# Altium PCB PCB_V2I3.PcbDoc
Units mil, origin at the board's own origin, x right, y up, seen from the top; angles counter-clockwise.
Board outline 2440.92 x 2539.37 mil, 2 copper layers (Top Layer, Bottom Layer); 68 components, 58 nets, 284 pads, 63 vias.
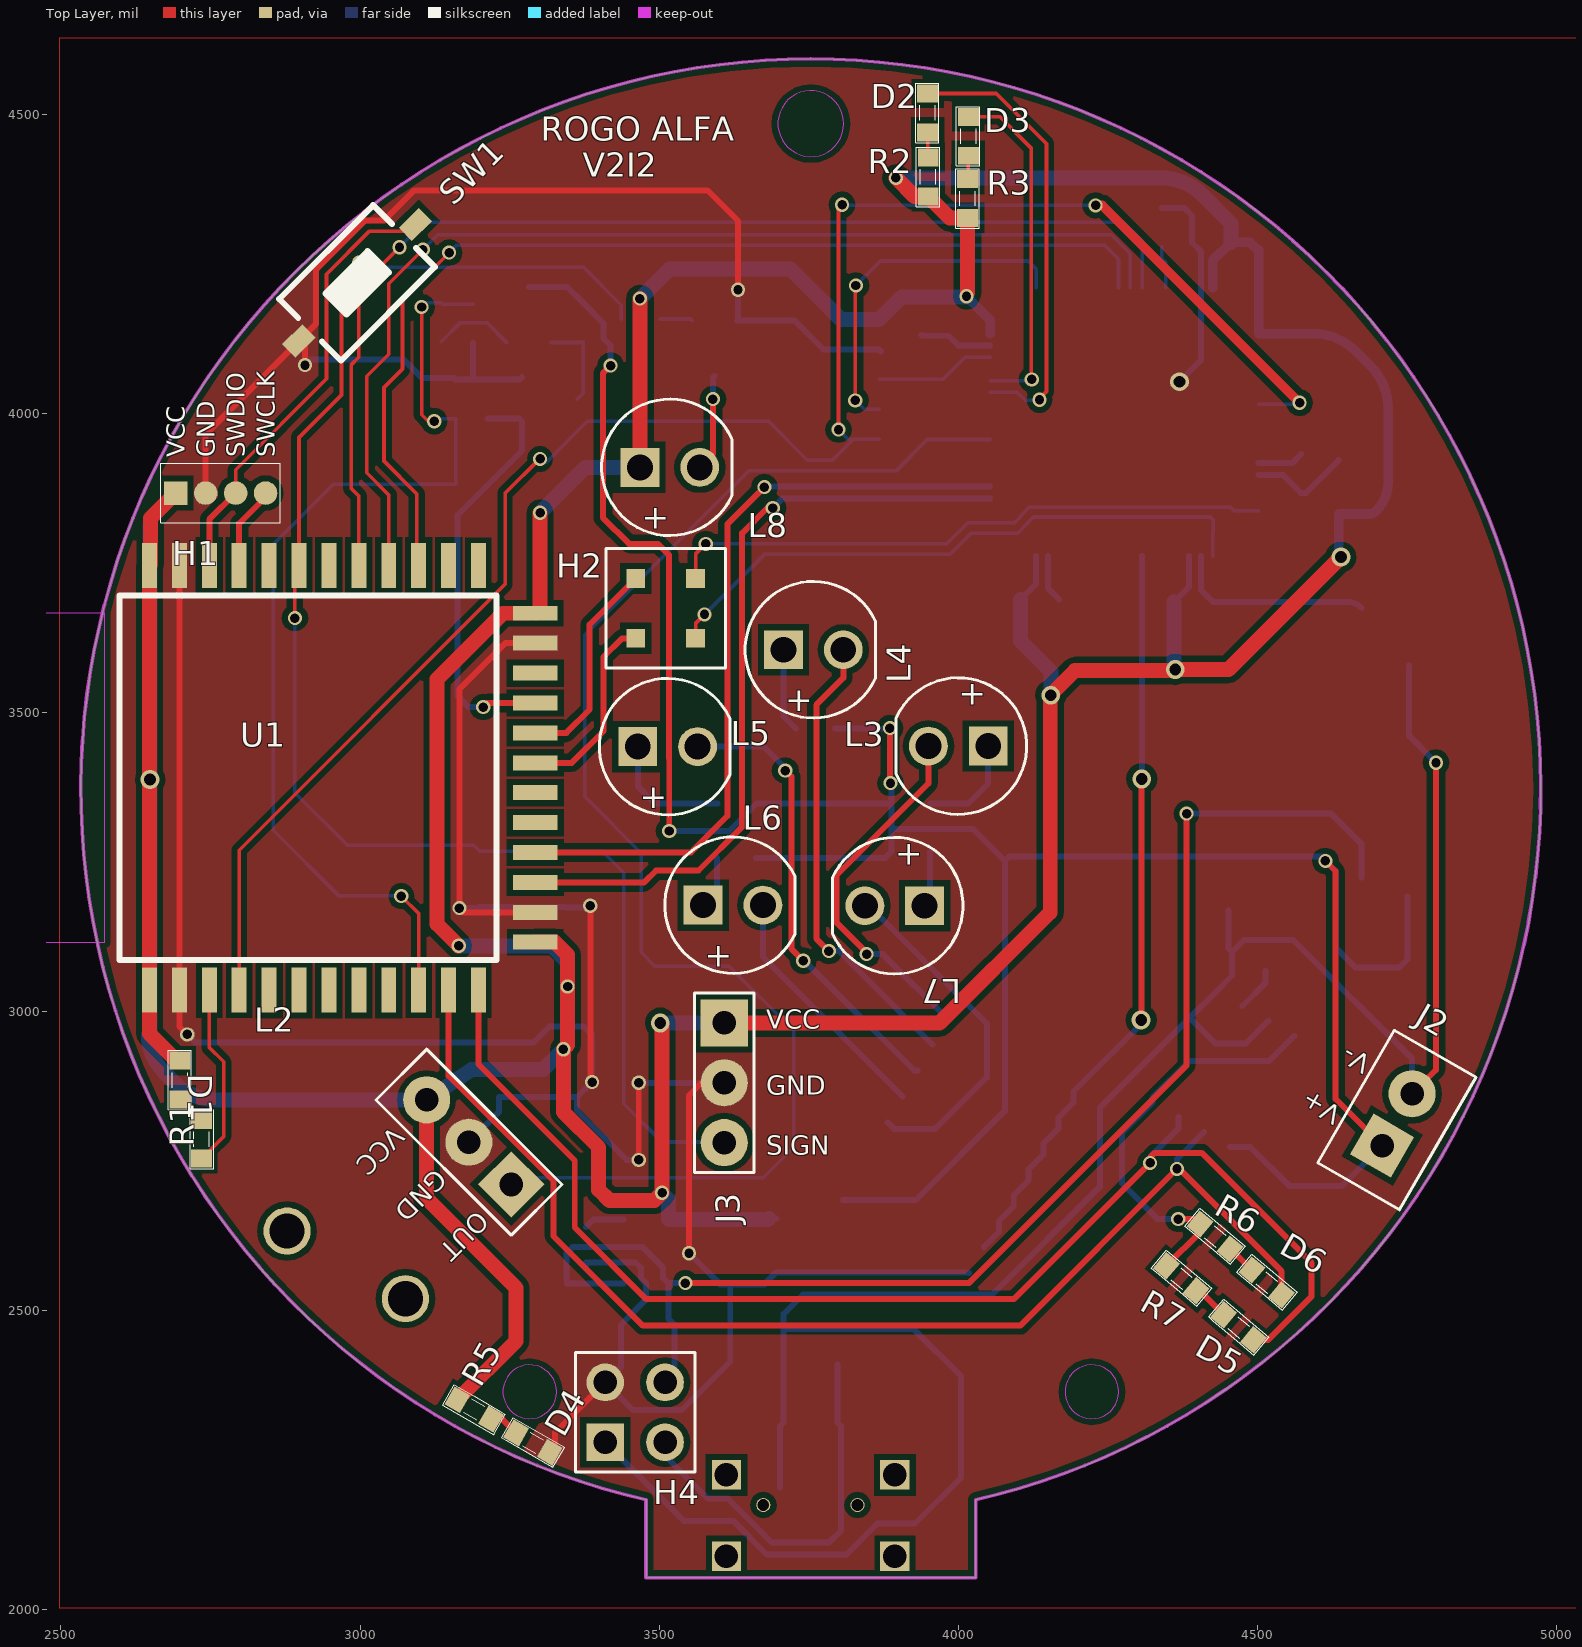
[diagram p0: Top Layer view]
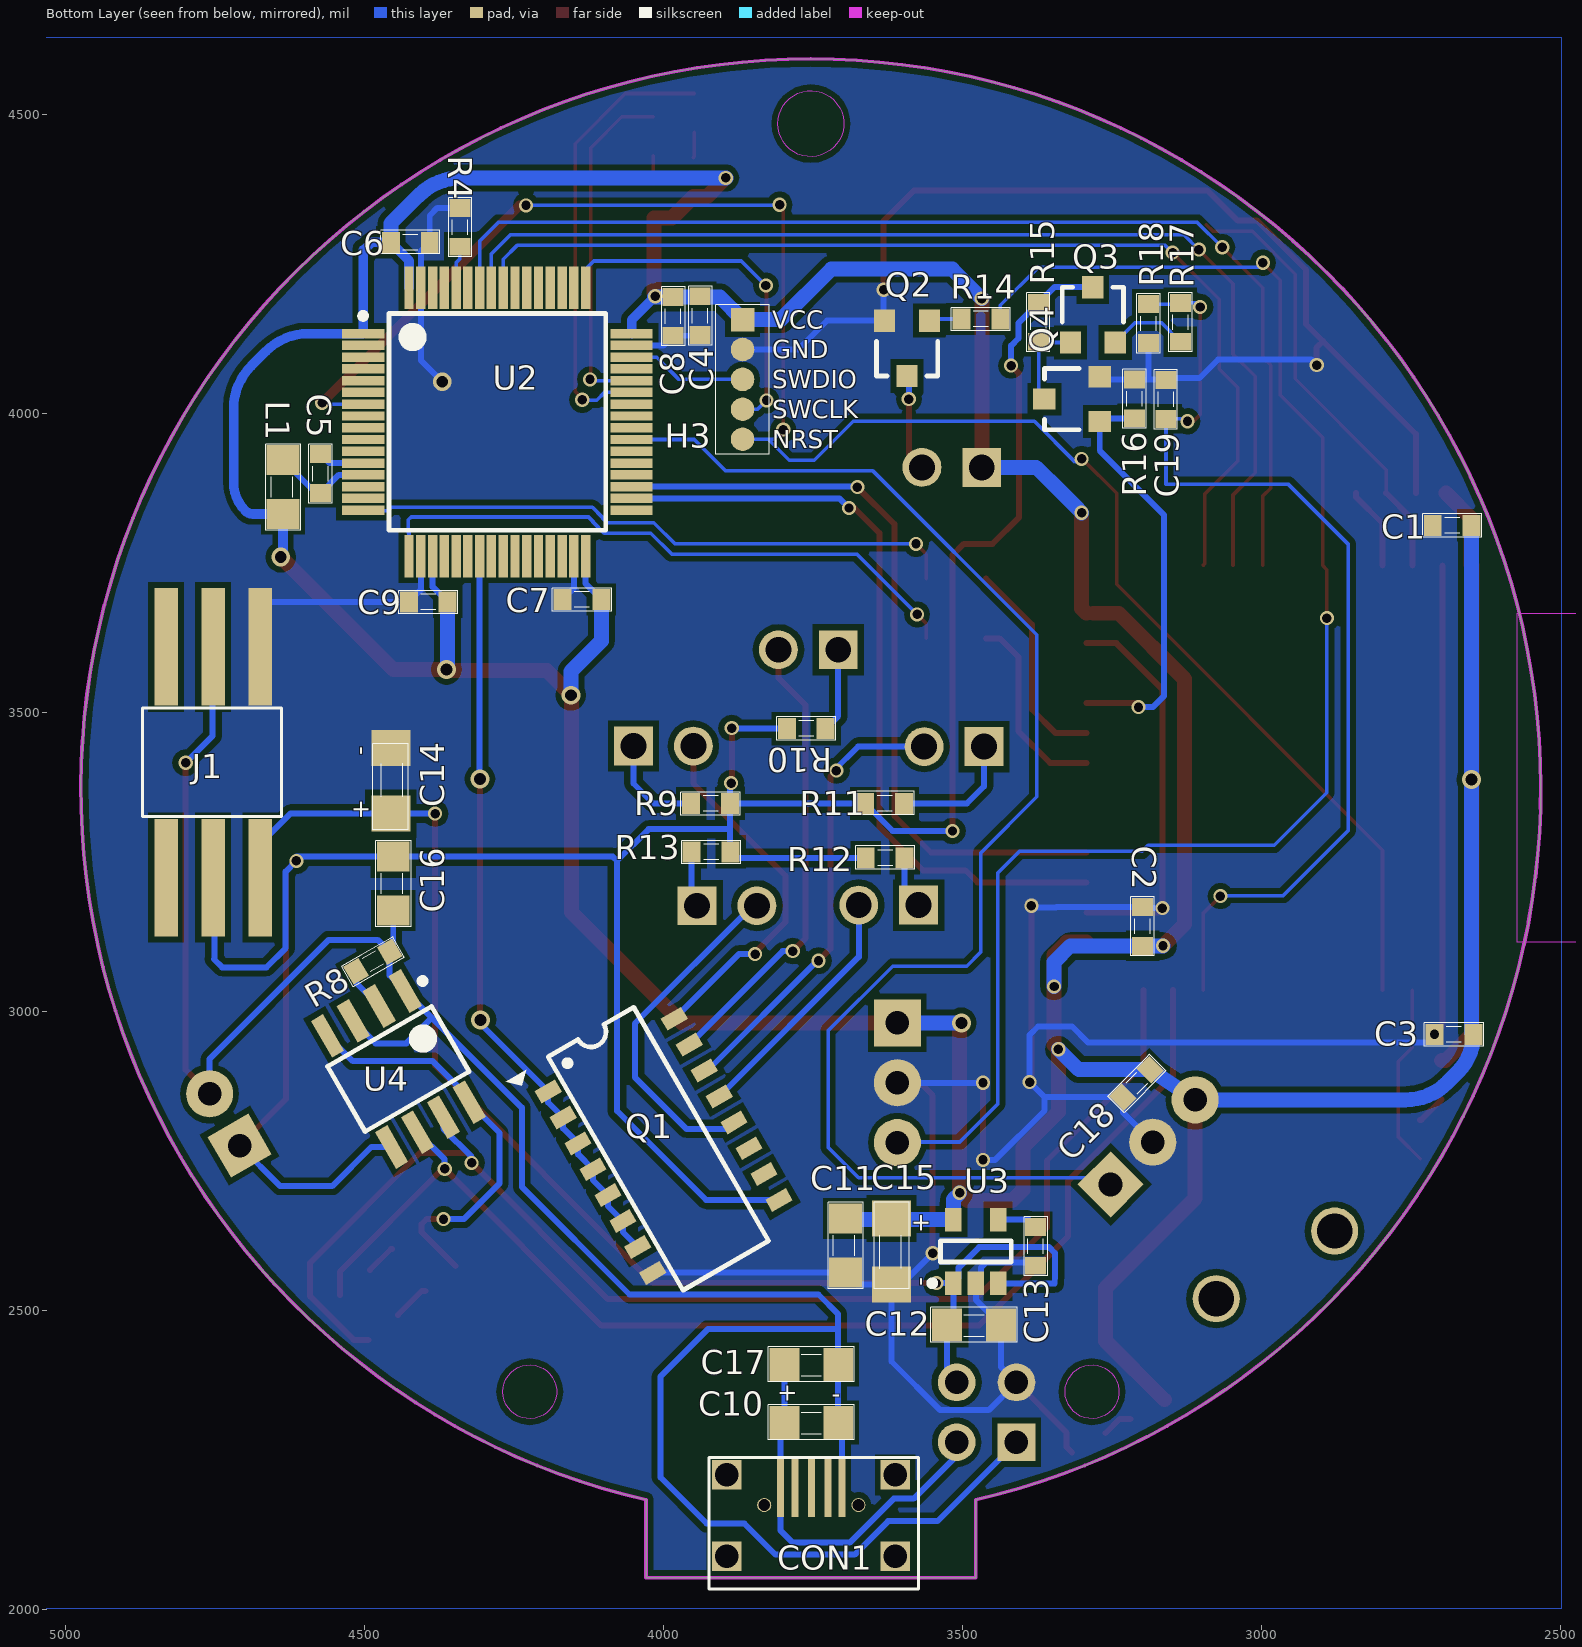
[diagram p1: Bottom Layer view, seen from below]

## Layer stack, top to bottom
Top Solder: solder mask 0.4, Solder Resist, Dk 3.5
Top Layer: signal copper 1.4
Dielectric 1: dielectric 12.6, FR-4, Dk 4.8
Bottom Layer: signal copper 1.4
Bottom Solder: solder mask 0.4, Solder Resist, Dk 3.5

## Board outline
3478.18,2053.49 3478.18,2183.44 cw(c3753.78,3372.39) 4029.37,2183.44 4029.37,2053.49

## Design rules (kind name [scope] priority, off if disabled: settings)
Clearance Clearance_1 [All vs InPolygon] p1: gap=10
Clearance [All] p2: gap=10
DiffPairsRouting [All] p1: maxlimit=10 minlimit=10 mostfreqgap=10 toplayer_minwidth=6 toplayer_maxwidth=20 toplayer_prefwidth=8 bottomlayer_minwidth=6 bottomlayer_maxwidth=20 bottomlayer_prefwidth=8 maxuncoupledlength=500
PolygonConnect [All] p1: connectstyle=Direct reliefconductorwidth=10 reliefentries=4 polygonreliefangle="90 Angle" airgapwidth=10
RoutingVias [All] p1: holewidth=15.75 width=23.62 viastyle="Through Hole" minholewidth=11.81 minwidth=23.62 maxholewidth=19.68 maxwidth=31.5
SolderMaskExpansion [All] p1: expansion=4
Width [All] p1: maxlimit=25 minlimit=6 preferedwidth=16
29 further rules are at their usual default settings.

## Classes and differential pairs
component class "[03] - MODULE BLE": C1 C2 C3 D1 H1 H2 R1 SW1 U1
component class "[04] - MCU STM32": C4 C5 C6 C7 C8 C9 D2 D3 H3 L1 R2 R3 R4 U2
component class "[05] - POWER": C10 C11 C12 C13 C14 C15 C16 C17 CON1 D4 D5 D6 H4 J1 J2 R5 R6 R7 R8 U3 U4
component class "[06] - PERIPHERAL": C18 C19 J3 L2 L3 L4 L5 L6 L7 L8 Q1 Q2 Q3 Q4 R9 R10 R11 R12 R13 R14 R15 R16 R17 R18

## Components (designator, comment, footprint, x,y, rotation, side; value= is the part's Value field where it differs from the comment)
C1 "C_104_0603_CERAMIC_16V" CAP_SMD0603 2694,3813 r0 bottom
C2 "C_104_0603_CERAMIC_16V" CAP_SMD0603 3199,3155 r90 bottom
C3 "C_104_0603_CERAMIC_16V" CAP_SMD0603 2691,2962 r0 bottom
C4 "C_104_0603_CERAMIC_16V" CAP_SMD0603 3939,4151 r270 bottom
C5 "C_104_0603_CERAMIC_16V" CAP_SMD0603 4573.35,3912 r90 bottom
C6 "C_104_0603_CERAMIC_16V" CAP_SMD0603 4411,4286 r180 bottom
C7 "C_104_0603_CERAMIC_16V" CAP_SMD0603 4149,3689 r0 bottom
C8 "C_104_0603_CERAMIC_16V" CAP_SMD0603 3984,4150 r270 bottom
C9 "C_104_0603_CERAMIC_16V" CAP_SMD0603 4406,3685 r0 bottom
C10 "C_106_0805_TANTALUM_16V" "CAP_SMD0805 - TANTALUM" 3753,2313 r180 bottom
C11 "C_106_0805_CERAMIC_16V" CAP_SMD0805 3696,2609 r270 bottom
C12 "C_106_0805_CERAMIC_16V" CAP_SMD0805 3481,2476 r180 bottom
C13 "C_104_0603_CERAMIC_16V" CAP_SMD0603 3378,2595 r270 bottom
C14 "C_106_1206_TANTALUM_25V" CAP_SMD1206_TANTALUM 4456,3376 r90 bottom
C15 "C_106_1206_TANTALUM_25V" CAP_SMD1206_TANTALUM 3619,2609 r270 bottom
C16 "C_106_0805_CERAMIC_16V" CAP_SMD0805 4452,3214 r270 bottom
C17 "C_106_0805_CERAMIC_16V" CAP_SMD0805 3753,2410 r180 bottom
C18 "C_22pF_SMD0603_CERAMIC_50V" CAP_SMD0603 3218,2871 r315 bottom
C19 "C_104_0603_CERAMIC_16V" CAP_SMD0603 3160,4036 r90 bottom
CON1 "MICRO_USB" CON_MICRO_USB_HOLE 3894.18,2089.43 r180 bottom
D1 "LED2_GREEN_0603_2V" LED_GREEN_SMD0603 2735,2774 r270 top
D2 "GREEN" LED_GREEN_SMD0603 3949,4515 r90 top
D3 "YELLOW" LED_YELLOW_SMD0603 4017,4476 r90 top
D4 "LED2_RED_0603_2V" LED_RED_SMD0603 3300,2273 r330 top
D5 "GREEN" LED_GREEN_SMD0603 4478.47,2464.07 r320 top
D6 "RED" LED_RED_SMD0603 4525.53,2538.93 r320 top
H1 "SWDIO_NRF518XX" HEADER4_ISP_NRF518xx_SUR1.27 2692,3867 r0 top
H2 "HEADER2_MALE2_SURFACE_2.54_6.1MM" HEADER2_MALE2_SUR2.54 3461,3724.18 r0 top
H3 "SWDIO_STM32xx" "HEADER5_ISP_STM32F0xx_SUR1.27 - duplicate" 3868,4157 r270 bottom
H4 "HEADER2_MALE2_HOLE2.54_5.8MM" HEADER2_MALE2_HOLE2.54 3410,2280 r90 top
J1 "PUSH_POWER" SW6_DPDT_POWER 4831.74,3326.36 r180 bottom
J2 "ZACK_BAT" ZACK_BAT 4709,2776 r60 top
J3 "SIGN_LED" HEADER3_SIGN_LED 3609,2981 r270 top
L1 "CHOKE_100NH_SMD0805" CHOKE_SMD0805 4636.36,3877 r270 bottom
L2 "LED3_RECEIVER_IR" LED3_IR_RECEIVER 3252.78,2710.92 r135 top
L3 "TSAL6400" LED2_IR_TRANSMITOR 4000.29,3444 r180 top
L4 "TSAL6400" LED2_IR_TRANSMITOR 3758,3605 r0 top
L5 "TSAL6400" LED2_IR_TRANSMITOR 3514.36,3443 r0 top
L6 "TSAL6400" LED2_IR_TRANSMITOR 3623.64,3178 r0 top
L7 "TSAL6400" LED2_IR_TRANSMITOR 3894,3177 r180 top
L8 "LED 3W" LED2_IR_TRANSMITOR 3518,3910 r0 top
Q1 "ULN2003A" TRAN7_ULN2003_16SOIC 4008.74,2770.61 r240 bottom
Q2 "NPN" TRAN-NPN-SMD 3593,4109 r0 bottom
Q3 "SI2307" TRAN-PNP-SMD 3282.37,4164.93 r180 bottom
Q4 "SI2308" TRAN-NPN-SMD 3317,4024 r90 bottom
R1 "R_10K_SMD0603_1%_1/10W" RES_SMD0603 2699,2898 r90 top
R2 "R_10K_SMD0603_1%_1/10W" RES_SMD0603 3950,4408 r90 top
R3 "R_10K_SMD0603_1%_1/10W" RES_SMD0603 4016,4372 r90 top
R4 "R_10K_SMD0603_1%_1/10W" RES_SMD0603 4340.49,4298.85 r270 bottom
R5 "R_10K_SMD0603_1%_1/10W" RES_SMD0603 3180,2341 r150 top
R6 "R_10K_SMD0603_1%_1/10W" RES_SMD0603 4439,2616 r320 top
R7 "R_10K_SMD0603_1%_1/10W" RES_SMD0603 4382.68,2545.86 r320 top
R8 "R_1K2_SMD0603_1%_1/10W" RES_SMD0603 4496.97,3077.5 r330 bottom
R9 "R_1OhM_SMD0603_1%_1/4W" RES_SMD0603 3934,3348 r0 bottom
R10 "R_1OhM_SMD0603_1%_1/4W" RES_SMD0603 3749,3473 r180 bottom
R11 "R_1OhM_SMD0603_1%_1/4W" RES_SMD0603 3618,3348 r180 bottom
R12 "R_1OhM_SMD0603_1%_1/4W" RES_SMD0603 3617,3257 r180 bottom
R13 "R_1OhM_SMD0603_1%_1/4W" RES_SMD0603 3933,3267 r0 bottom
R14 "R_1K_SMD0603_1%_1/10W" RES_SMD0603 3482,4158 r0 bottom
R15 "R_10K_SMD0603_1%_1/10W" RES_SMD0603 3373,4165 r90 bottom
R16 "R_100K_SMD0603_1%_1/10W" RES_SMD0603 3213,4012 r270 bottom
R17 "R_100K_SMD0603_1%_1/10W" RES_SMD0603 3135.99,4140 r270 bottom
R18 "R_22K_SMD0603_1%_1/10W" RES_SMD0603 3189,4163 r90 bottom
SW1 "RESET BLE" SW2-SMD 2995,4218.39 r225 top
U1 "MODULE_BLE_NRF518XX" MODULE_NRF518XX 2648,3016 r90 top
U2 "MCU_STM32F091RCT6_64-LQFP" MCU_STM32F091RCT6_LQFP64 4278,3986 r180 bottom
U3 "LD3985_3.3V" POWER_LDO_LDR3985-3.3 3478,2599 r90 bottom
U4 "TP4056" POWER__CHARGE_TP4056 4443.43,2904 r240 bottom

## Footprints (in the part's own frame and the unit in brackets; to place one, negate y for a bottom-side part, rotate by r counter-clockwise, add the part's x,y. Pads: shape width x height; smd on the part's side, far side on the other; paste and mask are expansions set on the pad)
CAP_SMD0603 [mil] "Compoment SMD 60x30mil"
  rect 30x35 smd: 1(-45,0) 2(20,0)
  silkscreen extent -62,-19 37,20, body extent -46,-17 16,17, height 33
CAP_SMD0805 [mil] "Compoment SMD 80x50mil"
  rect 50x55 smd: 1(-45,0) 2(45,0)
  silkscreen extent -72,-29 72,30, body extent -39,-25 39,25, height 22
"CAP_SMD0805 - TANTALUM" [mil] "Compoment SMD 80x50mil"
  rect 50x55 smd: 1(-45,0) 2(45,0)
  silkscreen extent -72,-29 72,30, body extent -39,-25 39,25, height 22
CAP_SMD1206_TANTALUM [mil] "Compoment SMD 80x50mil"
  rect 60x65 smd: 1(-45,0) 2(65,0)
  silkscreen extent -72,-29 72,30, body extent -53,-31 73,30, height 65
CHOKE_SMD0805 [mil] "Compoment SMD 80x50mil"
  rect 50x55 smd: 1(-45,0) 2(45,0)
  silkscreen extent -72,-29 72,30, body extent -39,-25 39,25, height 22
CON_MICRO_USB_HOLE [mm]
  rect 0.3x2.5 smd mask+0.05: 1(2.286,2.91) 2(2.886,2.91) 3(3.586,2.91) 4(4.286,2.91) 5(4.886,2.91)
  rect 1.25x1.25 hole 1 mask+0.05: ""(0,0) ""(0,3.45) ""(7.15,0) ""(7.15,3.45)
  round 0.6 hole 0.5 mask+0.05: ""(1.586,2.17) ""(5.586,2.17)
  silkscreen extent -0.76,-1.4 8.13,4.19, body extent -0.72,-1.45 8.08,4.18, height 2.77
HEADER2_MALE2_HOLE2.54 [mm] "HEADER, SINGLE, DISTANCE = 100mil"
  rect 1.6x1.6 hole 1: 1(0,0)
  round 1.6 hole 1: 2(2.54,0) 3(0,-2.54) 4(2.54,-2.54)
  silkscreen extent -1.27,-3.81 3.81,1.27, body extent -1.27,-3.81 3.81,1.27, height 8.17
HEADER2_MALE2_SUR2.54 [mm] "HEADER, SINGLE, DISTANCE = 100mil"
  rect 0.8x0.8 smd: 1(0,0) 2(2.54,0) 3(0,-2.54) 4(2.54,-2.54)
  silkscreen extent -1.27,-3.81 3.81,1.27, body extent -1.27,-3.81 3.81,1.27, height 8.17
HEADER3_SIGN_LED [mm] "HEADER, SINGLE, DISTANCE = 100mil"
  rect 2x2 hole 1: 1(0,0)
  round 2 hole 1: 2(2.54,0) 3(5.08,0)
  silkscreen extent -1.27,-1.27 6.35,1.27, body extent -1.27,-1.27 6.35,1.22, height 8.54
HEADER4_ISP_NRF518xx_SUR1.27 [mm] "HEADER, SINGLE, DISTANCE = 100mil"
  rect 1x1 smd: 1(0,0)
  round 1 smd: 2(1.27,0) 3(2.54,0) 4(3.81,0)
  silkscreen extent -0.64,-1.27 4.44,1.27, body extent -0.63,-1.2 4.45,1.21, height 5
"HEADER5_ISP_STM32F0xx_SUR1.27 - duplicate" [mm] "HEADER, SINGLE, DISTANCE = 100mil"
  rect 1x1 smd: 1(0,0)
  round 1 smd: 2(1.27,0) 3(2.54,0) 4(3.81,0) 5(5.08,0)
  silkscreen extent -0.64,-1.14 5.71,1.14, body extent -0.63,-1.2 4.45,1.2, height 5
LED2_IR_TRANSMITOR [mil] "LED phi 5mm"
  rect 65x65 hole 43.31: 1(-50,0)
  round 65 hole 43.31: 2(50,0)
  silkscreen extent -114,-114 104,114, body extent -116,-118 116,114, height 496
LED3_IR_RECEIVER [mm] "HEADER, SINGLE, DISTANCE = 100mil"
  rect 2x2 hole 1: 1(0,0)
  round 2 hole 1: 2(2.54,0) 3(5.08,0)
  round 2 hole 1.5: N(-0.254,6.604) N(5.334,8.128)
  silkscreen extent -1.52,-1.52 6.6,1.52, body extent -0.7,-0.33 6.1,9.47, height 7.1
LED_GREEN_SMD0603 [mil] "Compoment SMD 60x30mil"
  rect 30x35 smd: 1(-45,0) 2(20,0)
  silkscreen extent -62,-19 37,20, body extent -46,-16 17,16, height 24
LED_RED_SMD0603 [mil] "Compoment SMD 60x30mil"
  rect 30x35 smd: 1(-45,0) 2(20,0)
  silkscreen extent -62,-19 37,20, body extent -46,-16 17,16, height 24
LED_YELLOW_SMD0603 [mil] "Compoment SMD 60x30mil"
  rect 30x35 smd: 1(-45,0) 2(20,0)
  silkscreen extent -62,-19 37,20, body extent -46,-16 17,16, height 24
MCU_STM32F091RCT6_LQFP64 [mm] "STM32F091RCT6 LQFP64"
  rect 1.8x0.4 smd: 1(-5.7,3.75) 2(-5.7,3.25) 3(-5.7,2.75) 4(-5.7,2.25) 5(-5.7,1.75) 6(-5.7,1.25) 7(-5.7,0.75) 8(-5.7,0.25) 9(-5.7,-0.25) 10(-5.7,-0.75) 11(-5.7,-1.25) 12(-5.7,-1.75) 13(-5.7,-2.25) 14(-5.7,-2.75) 15(-5.7,-3.25) 16(-5.7,-3.75) 33(5.7,-3.75) 34(5.7,-3.25) 35(5.7,-2.75) 36(5.7,-2.25) 37(5.7,-1.75) 38(5.7,-1.25) 39(5.7,-0.75) 40(5.7,-0.25) 41(5.7,0.25) 42(5.7,0.75) 43(5.7,1.25) 44(5.7,1.75) 45(5.7,2.25) 46(5.7,2.75) 47(5.7,3.25) 48(5.7,3.75)
  rect 0.4x1.8 smd: 17(-3.75,-5.7) 18(-3.25,-5.7) 19(-2.75,-5.7) 20(-2.25,-5.7) 21(-1.75,-5.7) 22(-1.25,-5.7) 23(-0.75,-5.7) 24(-0.25,-5.7) 25(0.25,-5.7) 26(0.75,-5.7) 27(1.25,-5.7) 28(1.75,-5.7) 29(2.25,-5.7) 30(2.75,-5.7) 31(3.25,-5.7) 32(3.75,-5.7) 49(3.75,5.7) 50(3.25,5.7) 51(2.75,5.7) 52(2.25,5.7) 53(1.75,5.7) 54(1.25,5.7) 55(0.75,5.7) 56(0.25,5.7) 57(-0.25,5.7) 58(-0.75,5.7) 59(-1.25,5.7) 60(-1.75,5.7) 61(-2.25,5.7) 62(-2.75,5.7) 63(-3.25,5.7) 64(-3.75,5.7)
  silkscreen extent -5.82,-4.6 4.6,4.62, body extent -6,-6 6,6, height 1.6
MODULE_NRF518XX [mil] "MODULE BLE NRF51822 Madeby TUAN ANH"
  rect 75x25 smd: 1(20,0) 2(20,-50) 3(20,-100) 4(20,-150) 5(20,-200) 6(20,-250) 7(20,-300) 8(20,-350) 9(20,-400) 10(20,-450) 11(20,-500) 12(20,-550) 25(730,-550) 26(730,-500) 27(730,-450) 28(730,-400) 29(730,-350) 30(730,-300) 31(730,-250) 32(730,-200) 33(730,-150) 34(730,-100) 35(730,-50) 36(730,0)
  rect 25x75 smd: 13(100,-645) 14(150,-645) 15(200,-645) 16(250,-645) 17(300,-645) 18(350,-645) 19(400,-645) 20(450,-645) 21(500,-645) 22(550,-645) 23(600,-645) 24(650,-645)
  Keep-Out Layer region: 100,250 100,75 650,75 650,250
  silkscreen extent 70,-580 680,50
POWER__CHARGE_TP4056 [mm] "SOP, 8-Leads, Body 4.90x3.90mm, Pitch 1.27mm, IPC Medium Density"
  rect 1.8x0.6 smd: 1(-2.725,1.905) 2(-2.725,0.635) 3(-2.725,-0.635) 4(-2.725,-1.905) 5(2.725,-1.905) 6(2.725,-0.635) 7(2.725,0.635) 8(2.725,1.905)
  silkscreen extent -2.85,-2.55 1.6,2.88, body extent -3.02,-2.51 3.02,2.51, height 1.6
POWER_LDO_LDR3985-3.3 [mm] "SOT23, 5-Leads, Body 2.90x2.80mm, Pitch 0.95mm, IPC Medium Density"
  rect 1x0.7 smd: 1(-1.35,0.95) 2(-1.35,0) 3(-1.35,-0.95) 4(1.35,-0.95) 5(1.35,0.95)
  silkscreen extent -1.47,-1.5 0.45,1.98, body extent -0.85,-1.5 0.85,1.5, height 0.9
RES_SMD0603 [mil] "Compoment SMD 60x30mil"
  rect 30x35 smd: 1(-45,0) 2(20,0)
  silkscreen extent -62,-19 37,20, body extent -46,-17 17,17, height 19
SW2-SMD [mm] "Switch SMD type"
  rect 1.2x0.8 smd: 1(-3.5,0) 2(3.5,0)
  silkscreen extent -2.82,-1.85 2.82,1.85, body extent -3.05,-1.85 3.05,1.85, height 2.5
SW6_DPDT_POWER [mm] "PUSH POWER SOURCE"
  rect 1x5 smd: 1(0,-2.6) 2(2,-2.6) 3(4,-2.6) 4(4,7.2) 5(2,7.2) 6(0,7.2)
  silkscreen extent -1,0 4.9,4.6, body extent -3.05,-3.85 6.85,8.65, height 12.5
TRAN7_ULN2003_16SOIC [mm] "Small Outline; 16 Leads; Body Width 5.6 mm; Pitch 1.27 mm"
  rect 0.6x1 smd: 1(-4.445,-2.838) 2(-3.175,-2.838) 3(-1.905,-2.838) 4(-0.635,-2.838) 5(0.635,-2.838) 6(1.905,-2.838) 7(3.175,-2.838) 8(4.445,-2.838) 9(4.445,3.346) 10(3.175,3.346) 11(1.905,3.346) 12(0.635,3.346) 13(-0.635,3.346) 14(-1.905,3.346) 15(-3.175,3.346) 16(-4.445,3.346)
  silkscreen extent -5.73,-4.19 5.73,2.1, body extent -4.95,-2.75 4.95,3.25, height 1.4
TRAN-NPN-SMD [mm] "SOT-23; 3 Leads; Body 3.0 x 2.5 mm, inc. leads (LxW max)"
  rect 0.9x0.95 smd: 1(-0.95,-1.175) 2(0.95,-1.175) 3(0,1.175)
  silkscreen extent -1.3,-0.3 1.3,1.18, body extent -1.5,-1.44 1.5,1.06, height 1.06
TRAN-PNP-SMD [mm] "SOT-23; 3 Leads; Body 3.0 x 2.5 mm, inc. leads (LxW max)"
  rect 0.9x0.95 smd: 1(-0.95,-1.175) 2(0.95,-1.175) 3(0,1.175)
  silkscreen extent -1.3,-0.3 1.3,1.18, body extent -1.5,-1.38 1.5,1.12, height 1.06
ZACK_BAT [mm] "HEADER, SINGLE, DISTANCE = 100mil"
  rect 2x2 hole 1: 1(0,0)
  round 2 hole 1: 2(2.54,0)
  silkscreen extent -2,-2 4.5,2, body extent -1.34,-1.3 3.74,1.24, height 8.17

## Part data
C1 C2 C3 C4 C5 C6 C7 C8 C9 C13 C19: "CAP CER 0.1UF 16V X7R 0603"
C10: "CAP TANT 10UF 16V 10% 0805"
C11 C12 C16 C17: "CAP CER 10UF 16V X5R 0805"
C14 C15: "CAP TANT 10UF 25V 10% 1206"
C18: "CAP CER 22PF 50V NP0 0603"
CON1: library part CONNECT_MICRO_USB_SURFACE, "CONN RCPT STD MICRO USB TYPE B"
D1: "LED GREEN CLEAR 0603 SMD"
D2 D5: library part LED2_GREEN_0603_2V, "LED GREEN CLEAR 0603 SMD"
D3: library part LED2_YELLOW_0603_2.1V, "LED YELLOW CLEAR 0603 SMD"
D4: "LED RED CLEAR 0603 SMD"
D6: library part LED2_RED_0603_2V, "LED RED CLEAR 0603 SMD"
H1: library part HEADER4_ISP_NRF518XX_HOLE_2.54, "CONN HEADER 4POS .100 STR TIN"
H2: "CONN HEADER 4POS TIN SMD"
H3: library part HEADER5_ISP_STM32xx_HOLE_2.54, "CONN HEADER 5 POS 2.54"
H4: "02+02 DIL VERT PIN HDR"
J1: library part SW6_DPDT_HOLE_PUSH_0.1A_30A, "SWITCH PUSH DPDT 0.1A 30V"
J2: library part ZACK2_HOLE_BATTERY_LOCK, "CONN HEADER VERT 2POS .100 TIN"
J3: library part HEADER3_SIGN_LED_HOLE2.54, "CONN HEADER VERT 3POS .100 TIN"
L1: "FIXED IND 100NH 300MA 900 MOHM"
L2: library part LED3_RECEIVER_IR_HOLE_38KHz_3V, "RECEIVER IR REM CTRL 3V 38KHZ"
L3 L4 L5 L6 L7 L8: library part LED2_TRANSMITER_IR_TSAL6400_HOLE_5MM, "EMITTER IR 940NM 100MA RADIAL"
Q1: library part TRAN_7NPN_SMD_16SOIC, "TRANS 7NPN DARL 50V 0.5A 16SO"
Q2: library part TRAN_NPN_SMD_SOT23_0.2A_40V, "TRANS NPN 40V 0.2A SOT23"
Q3: library part TRAN_PCHANNEL_MOSFET_SI2307_SMD_TO236, "MOSFET P-CH 30V 3.5A SOT23-3"
Q4: library part TRAN_NCHANNEL_MOSFET_SI2308_SMD_SOT23-3, "MOSFET N-CH 60V 2.3A SOT23-3"
R1 R2 R3 R4 R5 R6 R7 R15: "RES SMD 10K OHM 1% 1/10W 0603"
R8: "RES SMD 1.2K OHM 1% 1/10W 0603"
R9 R10 R11 R12 R13: "RES SMD 1 OHM 1% 1/4W 0603"
R14: "RES SMD 1K OHM 1% 1/10W 0603"
R16 R17: "RES SMD 100K OHM 1% 1/10W 0603"
R18: "RES SMD 22K OHM 1% 1/10W 0603"
SW1: library part SW2_DPST_SURFACE_5MM, "SWITCH TACTILE SPST-NO 0.05A 12V"
U2: "IC MCU 32BIT 256KB FLASH 64LQFP"
U3: library part POWER_LDO_LD3985_3.3V_SOT-23-5, "IC REG LDO 3.3V 0.15A SOT23-5"
U4: library part POWER_CHARGE_TP4056_4.2V_SOP8, "IC CHARGR BATTERY L-ION  SOP8"

## Via types
v1: diameter 23.62, hole 15.75, Top Layer to Bottom Layer, 55 vias
v2: diameter 31.5, hole 19.68, Top Layer to Bottom Layer, tented both sides, 8 vias

## Nets (pads, with @x,y where several pads share a name; then routed paths per layer and width w, separated by ;. In a path a pad name is that pad's centre, name@x,y a point inside that pad or via, vN(x,y) a via of type N, cw(c..) or ccw(c..) an arc to the next point about the centre after c; other vN are vias at no path point)
5VCC_USB: C10.1 C17.1 CON1.1 H4.3 | length 665.7
  Bottom Layer w10: H4.3 3510,2257.52 3581.87,2185.65 3615.17,2185.65 3688.83,2112 3784,2112 3804.18,2132.18 CON1.1 3804.18,2306.82 C10.1 C17.1
ADC_BAT: U1.9
BLE_ADC_BAT: C19.1 R17.1 R18.2 U1.10 | length 1697.4
  Top Layer w6: v1(3069,3193) 3098,3164 U1.10 ; v1(3103,4178) 3103,3998 3114,3987 v1(3124,3987)
  Bottom Layer w6: v1(3069,3193) 3070,3194 2964,3194 2855,3303 2855,3781 2956,3882 3160,3882 C19.1 3128,3991 v1(3124,3987) ; v1(3103,4178) 3110,4185 R17.1 3137.99,4183 R18.2
BLE_CHRG: D5.2 U1.12 U4.7 | length 2207.1
  Top Layer w10: U1.12 3198,2912 3359,2751 3359,2639 3478.81,2519.19 4093.19,2519.19 v1(4321,2747) ; v1@4322,2747 4322,2757 4328.81,2763.81 4407.19,2763.81 4591,2580 4591,2524 4518.22,2451.22 D5.2
  Bottom Layer w10: v1(4321,2747) 4321,2757 4368.14,2804.14 U4.7
BLE_LED: D1.2 U1.3 | length 307.3
  Top Layer w6: D1.2 2772,2791 2772,2916 2748,2940 U1.3
BLE_LED3W: J3.3 R14.1 U1.31 | length 2608.2
  Top Layer w6: v1(2891,3658) 2891,3739 U1.31 2898,3960 2969,4031 2969,4223 v1(2998,4252)
  Bottom Layer w6: v1(2891,3658) 2891,3366 2979,3278 3190,3278 3200,3268 3405,3268 3441,3232 3441,2846 3505,2782 3608,2782 J3.3 ; v1(2998,4252) 3005.81,4244.19 3373.81,4244.19 3437,4181 R14.1
BLE_MEASURE_BAT: Q4.1 R16.2 U1.21 | length 704
  Top Layer w10: v1(3206,3509) 3213,3516 U1.21
  Bottom Layer w10: v1(3206,3509) 3182,3509 3163,3528 3163,3830 3270.74,3937.74 Q4.1 3265.34,3992 R16.2
BLE_RESET_ST: H3.5 U1.4 U2.7 | length 3125.9
  Top Layer w6: U1.4 2798,3270 3242.5,3714.5 3242.5,3866.5 3300,3924 v1(3301,3924) ; v1(3800,3973) 3800,4343 v1(3806,4349)
  Top Layer w16: v1(4230,4348) 4241,4348 v1(4571,4018)
  Bottom Layer w6: v1(3301,3924) 3301,3930 3312,3919 3380,3987 3683,3987 3748,3922 3790,3922 3825,3957 ; v1(3800,3973) 3816,3957 3825,3957 ; v1(3806,4349) 3807,4348 v1(4230,4348) ; H3.5 3825,3957 ; U2.7 4568.53,4015.53 v1(4571,4018)
BLE_RX: H2.1 U1.20 | length 358.2
  Top Layer w10: U1.20 3345,3466 3384,3505 3384,3647.18 H2.1
BLE_STATUS_ST: U1.15 U2.34 | length 1314.2
  Top Layer w10: U1.15 3475,3216 3495,3236 3566,3236 3639,3309 3639,3800 3681,3842 v1(3690,3842)
  Bottom Layer w10: v1(3690,3842) 3705.73,3857.73 3992,3857.73 3992.32,3858.05 U2.34
BLE_STATUS_ST1: U1.27 U2.56 | length 1773.3
  Top Layer w6: U1.27 3095,3749 3095,3865.5 3040,3920.5 3040,4043.5 3071,4074.5 3071,4191 v1(3149,4269)
  Bottom Layer w6: v1(3149,4269) 3161,4281 4245,4281 4268.16,4257.84 U2.56
BLE_STATUS_ST2: U1.28 U2.57 | length 1845.4
  Top Layer w6: U1.28 3048,3863.75 3011,3900.75 3011,4062.25 3048,4099.25 3048,4217 v1(3105,4274)
  Bottom Layer w6: v1(3105,4274) 3130,4299 4256,4299 4287.84,4267.16 U2.57
BLE_STATUS_ST3: U1.29 U2.58 | length 1921
  Top Layer w6: U1.29 2998,3862 2985,3875 2985,4081 2998,4094 2998,4210 v1(3066,4278)
  Bottom Layer w6: v1(3066,4278) 3108,4320 4276,4320 4307.53,4288.47 U2.58
BLE_STDBY: D6.2 U1.11 U4.6 | length 2063
  Top Layer w10: U1.11 3148,2892.59 3323.45,2717.13 3323.45,2624.55 3473,2475 4104,2475 v1(4366,2737) 4369.62,2737 4540.85,2565.77 D6.2
  Bottom Layer w10: v1(4366,2737) 4366,2753.15 U4.6
BLE_TX: H2.3 U1.19 | length 326.9
  Top Layer w10: U1.19 3354,3416 3407,3469 3407,3593 3438.18,3624.18 H2.3
BLE_WAKEUP_ST: U1.16 U2.35 | length 1299.8
  Top Layer w10: U1.16 3553,3266 3614,3327 3614,3815 v1(3676,3877)
  Bottom Layer w10: v1(3676,3877) 3676.73,3877.73 U2.35
GND: C1.2 C2.2 C3.2 C4.2 C6.2 C7.2 C8.2 C9.2 C11.2 C12.2 C13.2 C14.2 C15.2 C18.2 C19.2 D4.2 H1.2 H3.2 H4.2 J1.4 J3.2 L2.2 Q1.8 Q2.2 Q4.2 R4.1 R16.1 R18.1 SW1.2 U1.2 U1.14 U1.23 U1.35 U2.18 U2.31 U2.47 U2.63 U3.2 | length 8177.1
  Top Layer w10: U1.35 U1.2 2698,2975 v1(2711,2962) ; H1.2 2742,3965.39 SW1.2 ; v1(2908,4081) 2908,4110.51 SW1.2 ; U1.14 3173,3166 v1(3166,3173) 3166,3539 3243,3616 U1.23 ; D4.2 3326,2271.68 3326,2296 H4.2 ; v1(3385,3177) 3385,2885 v1(3388,2882) ; v1(3466,2752) v1(3466,2881) ; v1(3550,2596) 3550,2860 3571,2881 J3.2 ; v1(3632,4207) 3632,4322 3581,4373 3090.73,4373 3040.73,4323 3008.46,4323 2926,4240.54 2926,4149.39 SW1.2
  Bottom Layer w10: v1(2711,2962) 2725,2948 3290,2948 3317,2975 3374,2975 3388,2961 v1(3388,2882) 3362.86,2856.86 ; v1(2908,4081) 2917,4090 3073,4090 3104,4059 3157,4059 C19.2 3161,4057 3190,4057 ; v1(3166,3173) 3197,3173 C2.2 3343,3175 3344,3174 3382,3174 v1(3385,3177) ; L2.2 3232.14,2831.71 C18.2 3362.86,2856.86 ; R18.1 3189,4058 3190,4057 ; Q4.2 3266.34,4057 R16.1 3190,4057 ; C13.2 3378,2580.54 3460.59,2580.54 3469.38,2571.75 3469.38,2554.47 U3.2 3478,2518 C12.2 3436,2406 H4.2 3456.5,2333.5 3537.5,2333.5 3619,2415 C15.2 ; v1(3466,2752) 3445.54,2752 3362.86,2834.69 3362.86,2856.86 ; v1(3466,2881) J3.2 ; v1(3550,2596) 3602,2544 C15.2 ; v1(3632,4207) 3632,4156.86 Q2.2 3726.74,4155.26 3775,4107 H3.2 H3.2@3871,4104 ; C4.2 3940,4130 C8.2 4000.05,4113.95 U2.47 ; Q1.8 4017.19,2564 C11.2 3676,2544 C15.2 ; U2.31 4150.05,3707.95 C7.2 ; R4.1 4378.15,4343.85 4391,4331 C6.2 4405.95,4271.05 U2.63 4405.95,4088.95 v2(4370,4053) ; U2.18 4405.95,3705.05 C9.2 4650.12,3685 cw(c4650.12,3650.86) J1.4@4674.26,3675
GND_PIN: C10.2 C16.2 C17.2 CON1.5 H4.1 J1.5 J2.2 R8.1 U4.1 U4.3 | length 4056.6
  Top Layer w10: J2.2 4799,2902.6 v1(4799,3416)
  Bottom Layer w10: H4.1 3542,2148 3624.54,2148 3680.54,2092 3813,2092 3865,2144 3928,2144 4005,2221 4005,2390 3926,2469 3708,2469 ; CON1.5 3701.82,2306.82 C10.2 C17.2 3708,2469 ; C16.2 4452,3106 R8.1 ; U4.3 4481.31,2947 4430,2947 4387.35,2989.65 ; J1.5@4754,3578.46 4754,3461 v1(4799,3416) ; J2.2 4759,2921 4560,3120 4478,3120 R8.1 ; 3708,2469 3708,2494 3741,2527 4057,2527 4237,2707 4237,2839.29 4387.35,2989.65 ; 4387.35,2989.65 U4.1 4458,3060.29 R8.1
IR_SEND1: L3.2 Q1.16 | length 616.7
  Top Layer w10: v1(3847,3096) 3850,3096 3796.5,3149.5 3796.5,3227.5 3950.29,3381.29 L3.2
  Bottom Layer w10: v1(3847,3096) 3874.19,3096 Q1.16
IR_SEND2: L4.2 Q1.15 | length 769.2
  Top Layer w10: v1(3784,3101) 3763,3122 3763,3513 3808,3558 L4.2
  Bottom Layer w10: v1(3784,3101) 3800.89,3101 Q1.15
IR_SEND3: L5.2 Q1.14 | length 768.8
  Top Layer w10: v1(3711,3403) 3721.14,3392.86 3721.14,3104.86 v1(3741,3085)
  Bottom Layer w10: L5.2 3675,3443 3715,3403 v1(3711,3403) ; v1(3741,3085) 3743,3085 3926.57,2901.43 Q1.14
IR_SEND4: L6.2 Q1.13 | length 416.6
  Bottom Layer w10: L6.2 3673.64,3091.64 Q1.13
IR_SEND5: L7.2 Q1.12 | length 581.6
  Bottom Layer w10: L7.2 3851,3177 4048,2980 4048,2890 3962,2804 3892.98,2804 Q1.12
IR_SEND6: Q1.11
NetC5_1: C5.1 L1.1 U2.13 | length 169.3
  Bottom Layer w10: U2.13 4542.94,3897.42 C5.1 4581.36,3867 L1.1
NetC5_2: C5.2 U2.12 | length 77.1
  Bottom Layer w10: U2.12 4558.45,3917.1 C5.2
NetC12_1: C12.1 C14.1 H4.4 J1.3 U3.1 U3.3 | length 2341
  Top Layer w10: v1(3544,2546) 4018,2546 4382,2910 v1(4382,3331)
  Bottom Layer w10: U3.3 3440.6,2545 3346,2545 3346,2553.29 3345.5,2553.79 3345.5,2596.21 3355.29,2606 3472.53,2606 3506.78,2571.75 3506.78,2554.47 U3.1 ; H4.4 3526,2396 C12.1 3515.4,2486.6 U3.1 ; v1(3544,2546) 3543.85,2545.85 U3.1 ; v1(4382,3331) C14.1 4624,3331 4674.26,3280.74 J1.3
NetC13_1: C13.1 U3.4 | length 67.6
  Bottom Layer w10: C13.1 3390.15,2652.15 U3.4
NetD1_1: D1.1 R1.1 | length 50.1
  Top Layer w10: R1.1 2733,2819 D1.1
NetD2_1: D2.1 R2.2 | length 42.4
  Top Layer w6: D2.1 3949,4429 R2.2
NetD3_1: D3.1 R3.2 | length 39.4
  Top Layer w6: R3.2 4017,4393 D3.1
NetD4_1: D4.1 R5.1 | length 51.6
  Top Layer w10: R5.1 3238.03,2318.5 D4.1
NetD5_1: D5.1 R7.2 | length 62.6
  Top Layer w10: R7.2 4404,2533 D5.1
NetD6_1: D6.1 R6.2 | length 51.4
  Top Layer w10: R6.2 4455.76,2603.14 D6.1
NetL3_1: L3.1 R9.2 | length 172.8
  Bottom Layer w10: R9.2 4017,3348 4050.29,3381.29 L3.1
NetL4_1: L4.1 R10.2 | length 140.7
  Bottom Layer w10: L4.1 3708,3494 R10.2
NetL5_1: L5.1 R11.2 | length 211.9
  Bottom Layer w10: L5.1 3464.36,3376.64 3493,3348 R11.2
NetL6_1: L6.1 R12.2 | length 88.7
  Bottom Layer w10: L6.1 3597,3201.36 R12.2
NetL7_1: L7.1 R13.2 | length 93.7
  Bottom Layer w10: L7.1 3953,3186 R13.2
NetL8_2: L8.2 Q2.3 | length 163.1
  Top Layer w10: L8.2 3590,3932 v1(3590,4024)
  Bottom Layer w10: v1(3590,4024) 3590,4059.74 Q2.3
NetQ2_1: Q2.1 R14.2 | length 54.7
  Bottom Layer w6: R14.2 3552.86,4158 Q2.1
NetQ3_1: Q3.1 Q4.3 R15.1 | length 153.8
  Bottom Layer w6: Q3.1 3371.67,4118.67 R15.1 3373,4033.74 Q4.3
NetQ3_2: Q3.2 R17.2 | length 136
  Bottom Layer w6: R17.2 3167.99,4152 3211.64,4152 Q3.2
NetR4_2: R4.2 U2.60 | length 71.1
  Bottom Layer w6: R4.2 4340.49,4258.82 4346.9,4252.42 U2.60
NetR6_1: R6.1 R7.1 U4.4 U4.8 | length 696.2
  Top Layer w10: R7.1 4404.53,2631.1 R6.1 4396.45,2653 v1(4368,2653)
  Bottom Layer w10: v1(4368,2653) 4334,2653 4274,2713 4274,2797 4324.83,2847.83 U4.8 4324.83,2855.83 4386,2917 4519.61,2917 U4.4
NetR8_2: R8.2 U4.2 | length 74.2
  Bottom Layer w10: U4.2 4514.29,3048.28 R8.2
ST_IR_OUT: Q1.1 Q1.2 Q1.3 Q1.4 Q1.5 Q1.6 Q1.7 U2.23 | length 1264.3
  Top Layer w10: v2@4307,2986 v2(4307,3389)
  Bottom Layer w10: Q1.7 4068,2631.49 Q1.6 4093,2674.79 Q1.5 4118,2718.1 Q1.4 4143,2761.4 Q1.3 4168,2804.7 Q1.2 4193,2848 Q1.1 4306,2979.3 v2(4306,2986) ; v2(4307,3389) 4307.53,3389.53 U2.23
ST_IR_RECEIVE: L2.1 U2.39 | length 2385
  Bottom Layer w6: L2.1 3263.86,2722 3674,2722 3725,2773 3725,2968 3617,3076 3493,3076 3470,3099 3470,3265 3376,3359 3376,3630 3650,3904 3896.06,3904 3948.53,3956.47 U2.39
ST_LED1: D2.2 U2.43 | length 754.9
  Top Layer w6: D2.2 4064,4535 4147.81,4451.19 4147.81,4036.81 4136,4025 v1(4136,4023)
  Bottom Layer w6: U2.43 4098.79,4035.21 4112,4022 4135,4022 v1(4136,4023)
ST_LED2: D3.2 U2.44 | length 584.8
  Top Layer w6: D3.2 4070,4496 4122,4444 4122,4057 v1(4123,4057)
  Bottom Layer w6: U2.44 4120.9,4054.9 v1(4123,4057)
ST_RX: H2.4 U2.17 | length 1027.5
  Top Layer w6: H2.4 3561,3649 v1(3576,3664)
  Bottom Layer w6: v1(3576,3664) 3677,3765 3986.63,3765 4021.63,3800 4099.55,3800 4118.02,3818.48 4118.02,3819.4 4125.63,3827 4422,3827 4426.83,3822.17 4426.83,3800.36 ; U2.17 4425.64,3800.36
ST_SWCLK: H3.4 U2.49 | length 593.7
  Top Layer w6: v1(3828,4022) 3828,4213 v1(3829,4214)
  Bottom Layer w6: v1(3828,4022) 3843,4007 H3.4 ; v1(3829,4214) 3870,4255 4117,4255 4130.36,4241.64 U2.49
ST_SWDIO: H3.3 U2.46 | length 201
  Bottom Layer w6: H3.3 3974.32,4057 4011.58,4094.27 U2.46
ST_TX: H2.2 U2.16 | length 1017.5
  Top Layer w6: H2.2 3561,3765 v1(3578,3782)
  Bottom Layer w6: v1(3578,3782) 3981,3782 4016.49,3817.49 4094.41,3817.49 4102.02,3825.1 4102.02,3826.02 4119,3843 4455.76,3843 4461.59,3837.17 U2.16@4502.41,3837.17
SWCLK: H1.4 U1.33 | length 139.2
  Top Layer w10: U1.33 2798,3816 2842,3860 H1.4
SWDIO: H1.3 SW1.1 U1.34 | length 751
  Top Layer w6: H1.3 2792,3906 2944,4058 2944,4233.09 3015.91,4305 3081.61,4305 SW1.1
  Top Layer w10: U1.34 2748,3823 H1.3
VCC: C1.1 C2.1 C3.1 C4.1 C6.1 C7.1 C8.1 C9.1 C11.1 C15.1 C18.1 H1.1 H3.1 J3.1 L1.2 L2.3 L8.1 R1.2 R2.1 R3.1 R5.2 U1.1 U1.13 U1.24 U1.36 U2.1 U2.19 U2.32 U2.48 U2.64 U3.5 | length 10587.9
  Top Layer w10: U1.24@3281,3666 U1.24
  Top Layer w25: H1.1 2649.84,3824.84 2649.84,3747.84 U1.36 U1.1 2648,2963 2693,2918 R1.2 ; L2.3 3111.36,2687.64 3261,2538 3261,2449.32 R5.2 ; v1(3165,3110) 3129,3146 3129,3556 3239,3666 U1.24@3281,3666 ; U1.13 3326,3116 3347,3095 v1(3347,3042) 3347,2944 v1(3340,2937) 3340,2832 3399,2773 3399,2702 3417,2684 3492,2684 v1(3505,2697) 3505,2978 v2(3502,2981) ; U1.24 3301,3674 v1(3301,3834) ; L8.1 v1(3468,4192) ; J3.1 3969,2981 4154,3166 4154,3529 4195,3570 4361,3570 v2(4363,3572) 4452,3572 v2(4640,3760) ; v1(3896,4394) 3927,4363 R2.1 3986,4327 R3.1 v1@4016,4202
  Bottom Layer w10: v1(3301,3834) 3301,3845 3349.5,3893.5 ; C11.1@3684,2654 C11.1 ; C7.1 4130.36,3715.36 U2.32 ; C9.1 4386.27,3710.27 U2.19
  Bottom Layer w16: v1@4015,4195 4053.59,4156.41 U2.48 ; U2.64 4425.64,4255.64 C6.1 4488,4286 4500,4274 4502.41,4274 U2.1 4593.94,4133.64 cw(c4593.94,4033.64) 4664.65,4104.35 4689.71,4079.29 cw(c4619,4008.58) 4719,4008.58 4719,3885.28 cw(c4650.72,3885.28) 4699,3837 cw(c4686.93,3849.07) 4686.93,3832 L1.2 4636.36,3768.78 ccw(c4648.78,3768.78) v2(4640,3760)
  Bottom Layer w25: C1.1 v2(2649,3388) 2649,2965 C3.1 ccw(c2735.33,2962) 2672.16,2898.84 2689.37,2881.63 ccw(c2760.08,2952.34) 2760.08,2852.34 L2.3 C18.1 3305.82,2902.82 v1(3340,2937) ; v1(3165,3110) C2.1 3320,3110 3347,3083 v1(3347,3042) ; v1(3301,3834) 3377,3910 L8.1 ; v1(3468,4192) 3517.31,4241.31 3719.69,4241.31 3804,4157 H3.1 3906,4195 C8.1 v1@4015,4195 ; v2(3502,2981) J3.1 ; v1@3505,2696.5 3515.4,2686.1 U3.5 3682.15,2652.15 C11.1@3684,2654 ; v1(3896,4394) 4338.58,4394 cw(c4338.58,4294) 4393.3,4377.7 cw(c4338.58,4294) 4409.29,4364.71 4456,4318 C6.1 ; C7.1 4104,3620 4155,3569 v2(4155,3529) ; C9.1 4361,3574 v2(4363,3572)
  other v1: 4014,4196
VCC_PIN: C16.1 J1.2 J2.1 Q1.9 Q3.3 R9.1 R10.1 R11.1 R12.1 R13.1 R15.2 U4.5 | length 4745.1
  Top Layer w10: v1(3419,4080) 3406,4067 3406,3826 3450,3782 3498,3782 3516.86,3763.14 3516.86,3423.18 3517,3423.04 v1(3517,3302) ; v1(3886,3474) 3886,3383 v1(3887,3382) ; v1(4614,3252) 4631,3235 4631,2854 J2.1
  Bottom Layer w10: Q3.3 3346.81,4211.19 R15.2 3407,4151 3407,4125.5 3419,4113.5 v1(3419,4080) ; v1(3517,3302) 3617,3302 R11.1 R9.1 ; R12.1 3878,3257 R13.1 3889,3268 3889,3305 ; R10.1 3885,3473 v1(3886,3474) ; Q1.9 3928.92,2684.92 4078,2834 4078,3252 ; v1(3887,3382) 3889,3380 R9.1 ; U4.5 4488.59,2773.59 4554.18,2708 4641,2708 J2.1 ; J1.2@4751,3192.64 4751,3089 4752,3088 4738,3074 4664,3074 4632,3106 4632,3234 v1(4614,3252) ; 3889,3305 4025,3305 4078,3252 ; 3889,3305 R9.1 ; 4078,3252 4085,3259 C16.1 v1@4607,3259 ; v1@4607,3259 4614,3259 v1(4614,3252) ; v1@4607,3259 v1(4614,3252)
pads on no net: CON1. CON1.2 CON1.3 CON1.4 J1.1 J1.6 L2.N Q1.10 U1.5 U1.6 U1.7 U1.8 U1.17 U1.18 U1.22 U1.25 U1.26 U1.30 U1.32 U2.2 U2.3 U2.4 U2.5 U2.6 U2.8 U2.9 U2.10 U2.11 U2.14 U2.15 U2.20 U2.21 U2.22 U2.24 U2.25 U2.26 U2.27 U2.28 U2.29 U2.30 U2.33 U2.36 U2.37 U2.38 U2.40 U2.41 U2.42 U2.45 U2.50 U2.51 U2.52 U2.53 U2.54 U2.55 U2.59 U2.61 U2.62

## Polygon pours and split planes (outlines as drawn)
GND on Top Layer "Bottom Layer-No Net" (solid, remove dead copper, pour order 9): 2360,4685 5089,4685 5182,4592 5194,4580 5194,1880 2539,1880 2371,2048
GND on Top Layer "Top Layer-No Net" (solid, remove dead copper, shelved, pour order 5): 2498,3839 2498,4628 3912,4628 5037,4628 5037,2594 5037,2002 3228,2002 2498,2002 2498,3719
GND on Bottom Layer "Bottom Layer-No Net" (solid, remove dead copper, pour order 7): 2429,4720 2435,4714 5067,4714 5067,1862 5078,1851 5072,1845 2435,1845
GND on Bottom Layer "Top Layer-No Net" (solid, remove dead copper, shelved, pour order 4): 2498,3839 2498,4628 3912,4628 5037,4628 5037,2594 5037,2002 3228,2002 2498,2002 2498,3719

## Keep-outs
Keep-Out Layer:
  circle w0.5: c4223.81,2364.39 r44.91
  circle w0.5: c3753.78,4484.6 r55.12
  circle w0.5: c3283.74,2364.39 r44.91
  lines w6: 3478.18,2053.49 3478.18,2183.44 cw(c3753.78,3372.39) 4029.37,2183.44 4029.37,2053.49 3478.18,2053.49

## Silkscreen, mask and mechanical layers (free items; w line width, h text height)
Top Overlay:
  text "ROGO ALFA /     V2I2" at 3302,4396 h40
Mechanical 1:
  circle w0.5: c3753.78,3608.61 r98.43
  circle w0.5: c3529.12,3445.39 r98.43
  circle w0.5: c3978.43,3445.39 r98.43
  circle w0.5: c3892.62,3181.29 r98.43
  circle w0.5: c3614.93,3181.29 r98.43
  circle w0.5: c4738.03,3372.39 r59.06
  lines w0.5: 3613.03,2053.49 3613.03,2312.16 3669.13,2312.16 ; 3624.84,2053.49 3624.84,2312.16 ; 3669.13,2053.49 3669.13,2312.16 ; 3674.02,2053.49 3674.02,2312.16 ; 3833.53,2053.49 3833.53,2312.16 ; 3838.42,2053.49 3838.42,2312.16 ; 3882.71,2053.49 3882.71,2312.16 ; 3894.52,2053.49 3894.52,2312.16 3838.42,2312.16 ; 3669.13,2312.16 3838.42,2312.16 ; 4619.92,3254.28 4619.92,3490.5 4856.14,3490.5 4856.14,3254.28 4619.92,3254.28
  lines w6: 3478.18,2053.49 3478.18,2183.44 cw(c3753.78,3372.39) 4029.37,2183.44 4029.37,2053.49 3478.18,2053.49

## Text inside footprints (layer, text, board x,y; h text height)
C10: Bottom Overlay "+" at 3810,2349 h30; Bottom Overlay "-" at 3719,2347 h30
C14: Bottom Overlay "-" at 4495,3429 h30 r270; Bottom Overlay "+" at 4493,3321 h30 r270
C15: Bottom Overlay "-" at 3580,2556 h30 r90; Bottom Overlay "+" at 3582,2664 h30 r90
H1: Top Overlay "SWCLK" at 2857,3927 h30 r90; Top Overlay "SWDIO" at 2807,3927 h30 r90; Top Overlay "GND" at 2757,3927 h30 r90; Top Overlay "VCC" at 2707,3927 h30 r90
H3: Bottom Overlay "VCC" at 3818,4142 h30; Bottom Overlay "GND" at 3818,4092 h30; Bottom Overlay "SWDIO" at 3818,4042 h30; Bottom Overlay "SWCLK" at 3818,3992 h30; Bottom Overlay "NRST" at 3818,3942 h30
J2: Top Overlay "V-" at 4693.05,2921.59 h31.5 r150; Top Overlay "V+" at 4643.83,2836.35 h31.5 r150
J3: Top Overlay "SIGN" at 3679,2761 h31.5; Top Overlay "GND" at 3679,2861 h31.5; Top Overlay "VCC" at 3679,2971 h31.5
L2: Top Overlay "OUT" at 3196.21,2668.49 h31.5 r225; Top Overlay "GND" at 3125.5,2739.2 h31.5 r225; Top Overlay "VCC" at 3054.79,2809.91 h31.5 r225
L3: Top Overlay "+" at 4047.29,3547 h40 r180
L4: Top Overlay "+" at 3711,3502 h40
L5: Top Overlay "+" at 3467.36,3340 h40
L6: Top Overlay "+" at 3576.64,3075 h40
L7: Top Overlay "+" at 3941,3280 h40 r180
L8: Top Overlay "+" at 3471,3807 h40